# Altium PCB PCB_WETBCV1.PcbDoc
Units mm, origin at the board's own origin, x right, y up, seen from the top; angles counter-clockwise.
Board outline 80.25 x 40.26 mm, 2 copper layers (Top Layer, Bottom Layer); 35 components, 23 nets, 107 pads, 7 vias.
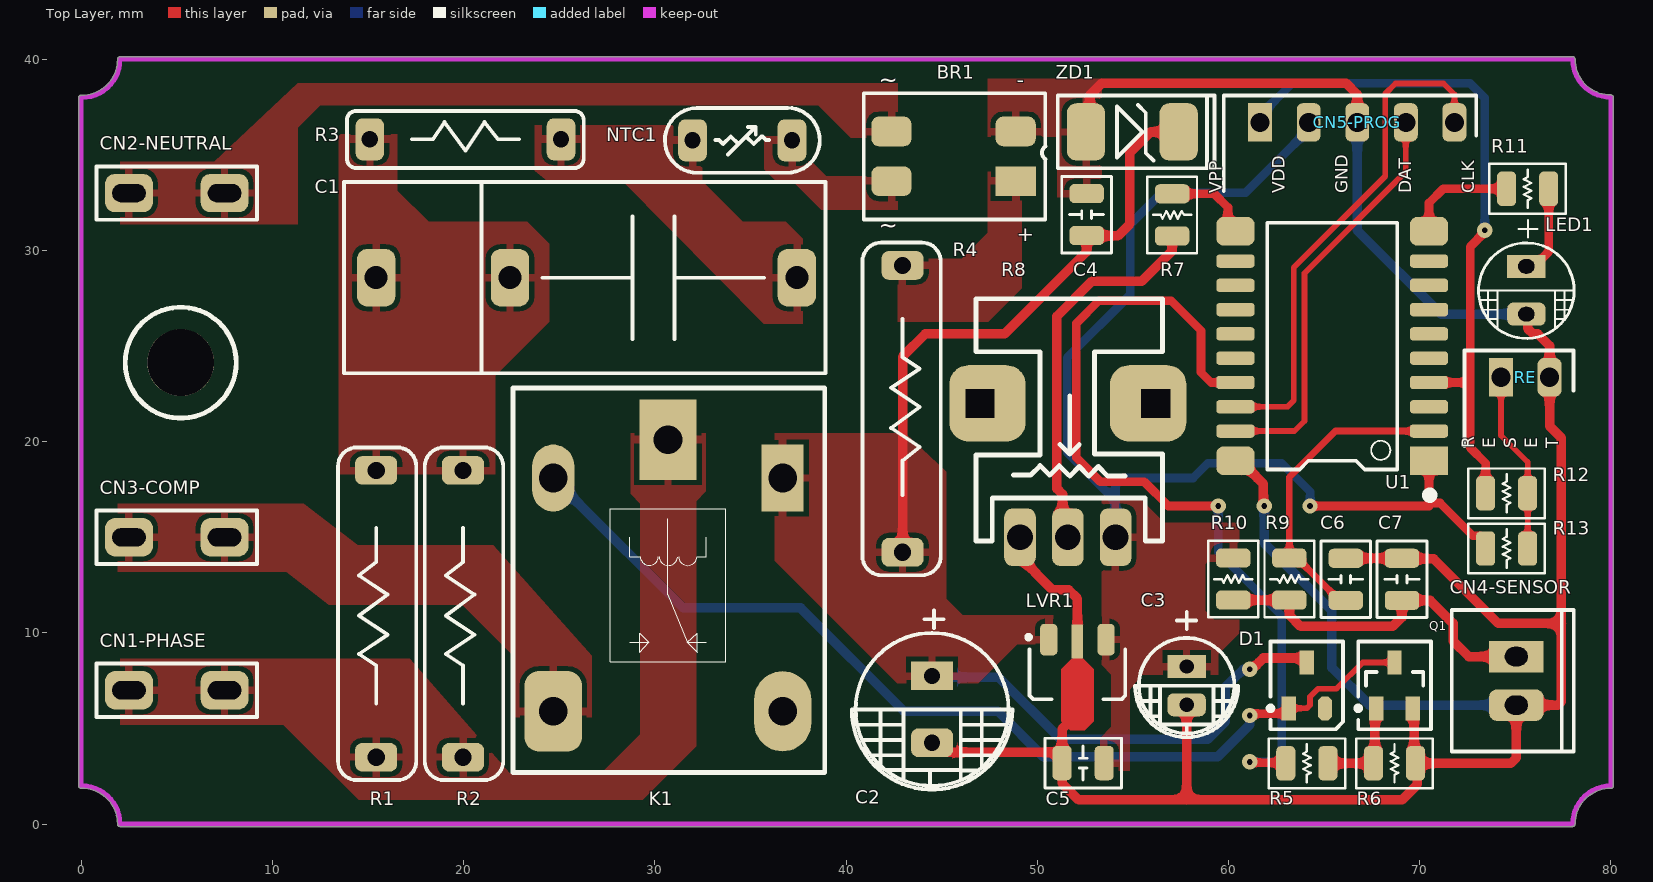
[diagram p0: Top Layer view]
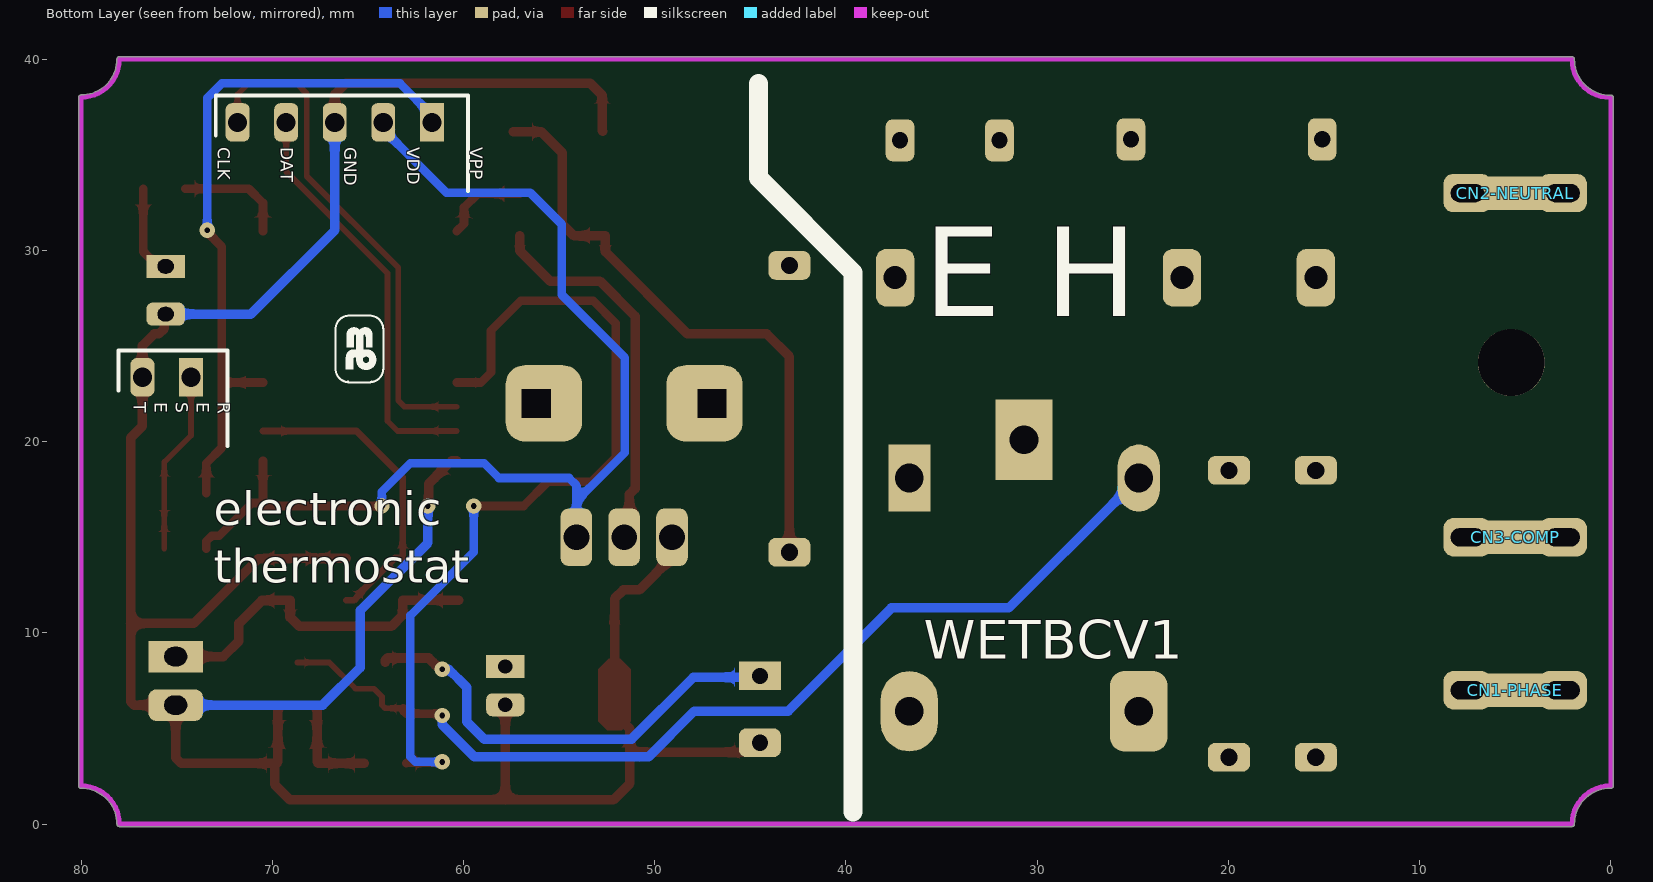
[diagram p1: Bottom Layer view, seen from below]
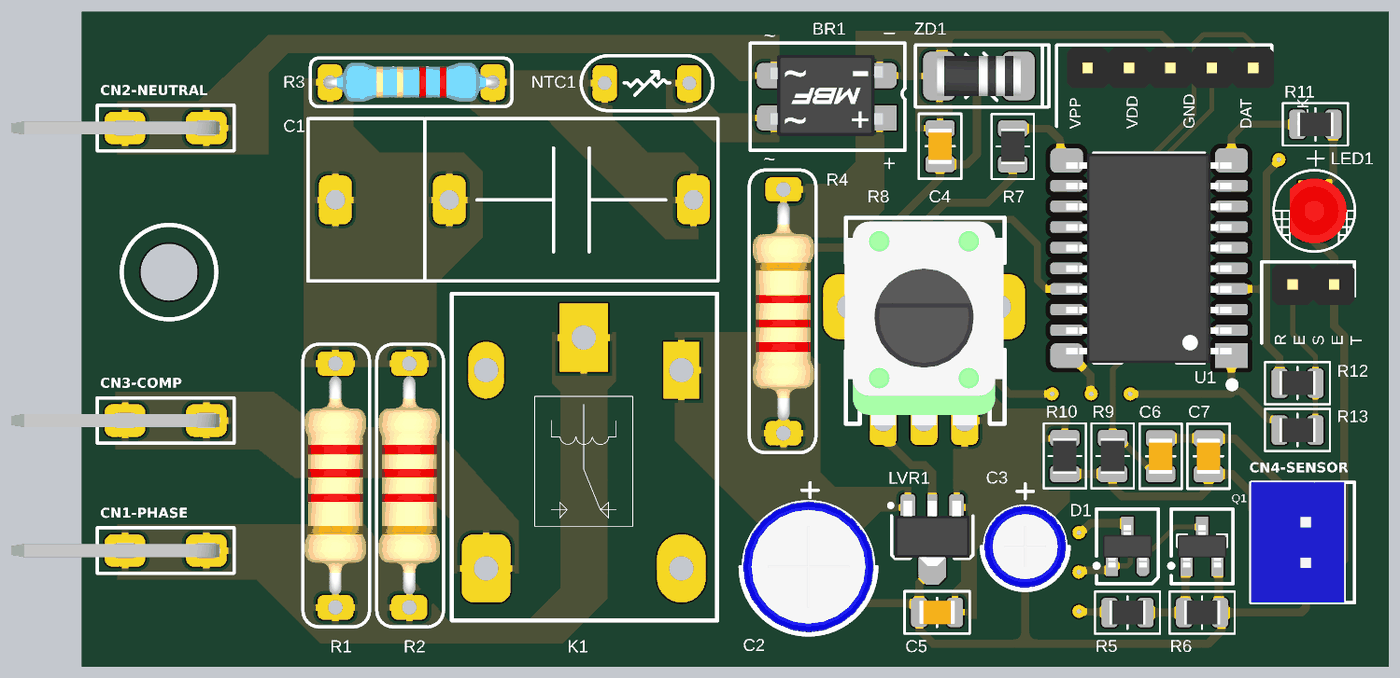
[diagram p2: 3D render of the assembled board from above, using the file's embedded part models]

## Layer stack, top to bottom
Top Solder: solder mask 0.0102, Solder Resist, Dk 3.5
Top Layer: signal copper 0.0356
Dielectric 1: dielectric 0.32, FR-4, Dk 4.8
Bottom Layer: signal copper 0.0356
Bottom Solder: solder mask 0.0102, Solder Resist, Dk 3.5

## Board outline
0.016,1.874 ccw(c0.032,2) 0.032,1.873 cw(c0.032,0) 1.905,0 ccw(c2.032,0) 2.032,-0.127 78,-0.127 ccw(c78,0) 78.127,0 cw(c80,0) 80,1.873 ccw(c80,2) 80.127,2 80.127,38.005 ccw(c80,38.005) 80,38.132 cw(c80,40.005) 78.127,40.005 ccw(c78,40.005) 77.965,40.127 2.032,40.127 ccw(c2.032,40) 1.905,39.997 ccw(c2.032,39.995) 1.905,39.995 cw(c0.032,39.995) 0.032,38.122 ccw(c0.032,37.995) 0.016,38.121 ccw(c0,37.995) -0.127,37.995 -0.127,2 ccw(c0,2)

## Design rules (kind name [scope] priority, off if disabled: settings)
Clearance [All] p1: gap=0.254 ignorepadtopadclearanceinfootprint=FALSE except(0: Arc-Hole Track-Hole SMDPad-Hole THPad-Hole Via-Hole Fill-Hole Poly-Hole Region-Hole Text-Hole)
HoleSize [All] p1: absolutevalues=TRUE maxlimit=5 minlimit=0.025 maxpercent=80.000 minpercent=20.000
PolygonConnect [All] p1: connectstyle=Relief reliefconductorwidth=0.4 reliefentries=4 polygonreliefangle="90 Angle" airgapwidth=0.254
RoutingVias [All] p1: holewidth=0.8 width=0.3 viastyle="Through Hole" minholewidth=0.6 minwidth=0.2 maxholewidth=1 maxwidth=0.6
SolderMaskExpansion [All] p1: expansion=0.102 istentingtop=FALSE
Width [All] p1: maxlimit=5 minlimit=0.254 preferedwidth=0.254
29 further rules are at their usual default settings.

## Components (designator, comment, footprint, x,y, rotation, side; value= is the part's Value field where it differs from the comment)
BR1 "MB6S" BR_SMD_MB6S 45.625,34.925 r0 top
C1 "MKP X2 .68uF" C_X2_18X10X15.8_P15 29.929,28.575 r0 top
C2 "220uF 25VDC 20%" C_Radial_P3.5 44.5,6 r270 top locked
C3 "100uF 16VDC 20%" C_Radial_P2 57.817,7.239 r270 top
C4 "0.33uF 25V 10%" C_0805 52.586,31.877 r90 top
C5 "0.1uF 16V 10%" C_0805 52.402,3.191 r180 top
C6 "0.1uF 16V 10%" C_0805 66.139,12.802 r270 top
C7 "0.1uF 16V 10%" C_0805 69.077,12.802 r270 top
CN1-PHASE "187 Series RA TAB" "CN_Tab Terminal 187 series (Right Angle)" 5,7 r180 top locked
CN2-NEUTRAL "187 Series RA TAB" "CN_Tab Terminal 187 series (Right Angle)" 5,33 r180 top locked
CN3-COMP "187 Series RA TAB" "CN_Tab Terminal 187 series (Right Angle)" 5,15 r180 top locked
CN4-SENSOR "A2512WV-2P-Red" CN_B2B-XH-A_WHITE 75.057,7.493 r0 top
CN5-PROG "2.54mm Pins" CN_PIC_MCU_Debugger_Straight 61.659,36.7 r90 top
D1 "BAS19" D_SOT-23-3_200mA 64.101,7.256 r0 top
K1 "Zettler AZ943–1CH–12DE" K_15ARelay_AZ943-1CH-12DE 30.689,13 r270 top locked
LED1 "RED, Vf=3.2V, 20mA" LED_3x5_P2.5 75.582,27.92 r270 top
LVR1 "+5VDC 100mA" U_CJ78L05_SOT89 52.102,7.847 r270 top
NTC1 "16D-7" NTC_5mmPitch 34.576,35.762 r0 top
Q1 "BC847" Q_SOT-23-3_NPN_BC847 68.687,7.256 r0 top
R1 "220Ω 2W 1%" R_Axial_P15 15.429,11 r90 top locked
R2 "220Ω 2W 1%" R_Axial_P15 19.971,11 r90 top locked
R3 "470KΩ 1/2W 1%" R_Axial_P10 20.098,35.814 r0 top
R4 "33Ω 1W 1%" R_Axial_P15 42.958,21.717 r270 top
R5 "1KΩ 1/8W 5%" R_0805 64.101,3.179 r0 top
R6 "47KΩ 1/8W 5%" R_0805 68.687,3.179 r0 top
R7 "470Ω 1/8W 5%" R_0805 57.055,31.865 r270 top
R8 "POT 10KΩ 1/8W 5%" R_POT 51.6,18.5 r0 top
R9 "1KΩ 1/8W 5%" R_0805 63.189,12.815 r90 top
R10 "10KΩ 1/8W 1%" R_0805 60.25,12.815 r270 top
R11 "470Ω 1/8W 5%" R_0805 75.649,33.227 r0 top
R12 "470Ω 1/8W 5%" R_0805 74.549,17.3 r0 top
R13 "4.7KΩ 1/8W 5%" R_0805 74.549,14.412 r0 top
RE "2P 2.54mm Male Connector" CN_PIC_MCU_Reseter_Straight 74.255,23.368 r90 top
U1 "SOIC PIC16F15344 I/SO" U_PIC16F15344_SOIC 65.429,25 r180 top locked
ZD1 "12V 1W 5%" "ZD_ZM4742A LL-41" 54.973,36.202 r180 top

## Footprints (in the part's own frame and the unit in brackets; to place one, negate y for a bottom-side part, rotate by r counter-clockwise, add the part's x,y. Pads: shape width x height; smd on the part's side, far side on the other; paste and mask are expansions set on the pad)
BR_SMD_MB6S [mm]
  rrect50% 2.1x1.55 smd: 1(-3.25,-1.3) 2(-3.25,1.3) 4(3.25,1.3)
  rect 2.1x1.55 smd: 3(3.25,-1.3)
  silkscreen extent -4.7,-3.3 4.82,3.3, body extent -3.45,-2.42 3.45,2.58, height 1.45
C_0805 [mm]
  rrect50% 1x1.8 smd: 1(-1.1,0) 2(1.1,0)
  silkscreen extent -2,-1.3 2,1.3, body extent -1.1,-0.72 1.1,0.73, height 1
C_Radial_P2 [mm] "Ø5*11mm"
  rect 1.2x2 hole 0.75: 1(-1,0)
  rrect50% 1.2x2 hole 0.75: 2(1,0)
  silkscreen extent -3.87,-2.7 2.7,2.7, body extent -2.53,-2.53 2.53,2.53, height 11.53
C_Radial_P3.5 [mm] "Ø8*11mm"
  rect 1.5x2.2 hole 0.85: 1(-1.75,0)
  rrect50% 1.5x2.2 hole 0.85: 2(1.75,0)
  silkscreen extent -5.18,-4.2 4.2,4.2, body extent -4.03,-4.03 4.03,4.03, height 12.03
C_X2_18X10X15.8_P15 [mm]
  rrect50% 2x3 hole 1.2: 1(-7.5,0) 2(7.5,0)
  silkscreen extent -9,-5 9,5, body extent -9,-5 9,5, height 15.8
CN_B2B-XH-A_WHITE [mm]
  rect 2.85x1.65 hole 1.2 slot 1 at 90 deg: 1(0,1.27)
  rrect50% 2.85x1.65 hole 1.2 slot 1 at 90 deg: 2(0,-1.27)
  silkscreen extent -3.38,-3.7 3,3.7, body extent -3.38,-3.7 2.37,3.7, height 7
CN_PIC_MCU_Debugger_Straight [mm]
  rect 2x1.25 hole 1: 1(0,0)
  rrect50% 2x1.25 hole 1: 2(0,-2.54) 3(0,-5.08) 4(0,-7.62) 5(0,-10.16)
  silkscreen extent -3.6,-11.3 1.4,1.91, body extent -1.24,-11.43 1.25,1.27, height 8.54
CN_PIC_MCU_Reseter_Straight [mm]
  rect 2x1.25 hole 1: 1(0,0)
  rrect50% 2x1.25 hole 1: 2(0,-2.54)
  silkscreen extent -3.6,-3.8 1.4,1.91, body extent -1.24,-3.81 1.25,1.27, height 8.54
"CN_Tab Terminal 187 series (Right Angle)" [mm]
  rrect50% 2.5x2 hole 0.95 slot 1.75 at 0 deg: 1(-2.5,0) 1(2.5,0)
  rect 2.85x1.75 smd far side: 1(0,0)
  silkscreen extent -4.2,-1.4 4.2,1.4, body extent -3.3,-0.4 9.5,0.4, height 9.3
D_SOT-23-3_200mA [mm] "Diodes - General Purpose 100V 200mA 1.25V @ 200mA SOT-23(SOT-23-3) RoHS"
  oct 0.75x1.25 smd: 0(0.95,-1.2)
  rect 0.75x1.25 smd: 1(-0.95,-1.2) 2(0,1.2)
  silkscreen extent -2.02,-2.3 1.9,2.3, body extent -1.5,-1.3 1.5,1.3, height 1.15
K_15ARelay_AZ943-1CH-12DE [mm]
  rect 4.2x3 hole 1.5: 1(-7.1,0)
  oval 3.5x2.2 hole 1.5: 2(-5.1,-6)
  rrect50% 4.2x3 hole 1.5: 3(7.1,-6)
  oval 4.2x3 hole 1.5: 4(7.1,6)
  rect 3.5x2.2 hole 1.5: 5(-5.1,6)
  silkscreen extent -9.8,-8.1 10.3,8.2, body extent -9.8,-8.1 10.3,8.2, height 15
LED_3x5_P2.5 [mm]
  rect 1.2x2 hole 0.85 slot 0.75 at 0 deg: 1(-1.25,0)
  rrect50% 1.2x2 hole 0.85 slot 0.75 at 0 deg: 2(1.25,0)
  silkscreen extent -3.67,-2.5 2.52,2.5, body extent -1.97,-1.5 2.01,1.99, height 7.38
NTC_5mmPitch [mm]
  rrect50% 1.5x2.2 hole 0.85: 1(-2.6,0) 2(2.6,0)
  silkscreen extent -4.05,-1.7 4.05,1.7, body extent -2.9,-1.64 2.9,1.69, height 6.75
Q_SOT-23-3_NPN_BC847 [mm] "SOT23, 3-Leads, Body 2.90x2.45mm, Pitch 0.95mm, IPC Medium Density"
  rect 0.75x1.25 smd: 1(-0.95,-1.2) 2(0.95,-1.2) 3(0,1.2)
  silkscreen extent -2.02,-2.3 1.9,2.3, body extent -1.5,-1.3 1.5,1.3, height 1.15
R_0805 [mm]
  rrect50% 1x1.8 smd: 1(-1.1,0) 2(1.1,0)
  silkscreen extent -2,-1.3 2,1.3, body extent -1.1,-0.72 1.1,0.73, height 0.65
R_Axial_P10 [mm] "Resistors 7mm Length"
  rrect50% 1.5x2.2 hole 0.85: 1(-5,0) 2(5,0)
  silkscreen extent -6.2,-1.5 6.18,1.48, body extent -5.38,-1.2 5.38,1.2, height 2.41
R_Axial_P15 [mm] "Resistors 12mm Length"
  rrect50% 1.5x2.2 hole 0.9: 1(-7.5,0) 2(7.5,0)
  silkscreen extent -8.7,-2.1 8.7,2, body extent -6.72,-1.87 6.73,1.88, height 5.87
R_POT [mm]
  rrect50% 4x4 hole 1.5 square copper offset 0.4,0: 0(-4.6,3.5)
  rrect50% 4x4 hole 1.5 square copper offset -0.4,0: 0(4.6,3.5)
  rrect50% 1.65x3 hole 1.35: 1(2.5,-3.5) 2(0,-3.5) 3(-2.5,-3.5)
  silkscreen extent -4.8,-3.7 4.95,8.97, body extent -4.88,-3.8 4.88,8.75, height 15.26
U_CJ78L05_SOT89 [mm] "SOT89, 3-Leads, Body 4.50x2.45mm, Pitch 1.50mm, Lead Span 4.1mm - Reverse Pinning, IPC Medium Density"
  rrect50% 1.65x0.9 smd: 1(-1.8,1.5) 3(-1.8,-1.5)
  rect 1.8x0.6 smd: 2(-1.7,0)
  Top Layer region: -0.8,0.3 -0.25,0.85 2.479,0.85 2.948,0.381 2.948,-0.381 2.479,-0.85 -0.25,-0.85 -0.8,-0.3
  silkscreen extent -2.03,-2.65 1.32,2.5, body extent -2.2,-2.3 1.8,2.3, height 1.6
U_PIC16F15344_SOIC [mm] "SOIC, 20-Leads, Body 12.80x7.50mm, Pitch 1.27mm, IPC Medium Density"
  rect 2x1.5 smd mask+0.3: 1(-5.063,6)
  rrect50% 2x0.7 smd mask+0.3: 2(-5.063,4.445) 3(-5.063,3.175) 4(-5.063,1.905) 5(-5.063,0.635) 6(-5.063,-0.635) 7(-5.063,-1.905) 8(-5.063,-3.175) 9(-5.063,-4.445) 12(5.063,-4.445) 13(5.063,-3.175) 14(5.063,-1.905) 15(5.063,-0.635) 16(5.063,0.635) 17(5.063,1.905) 18(5.063,3.175) 19(5.063,4.445)
  rrect50% 2x1.5 smd mask+0.3: 10(-5.063,-6) 11(5.063,-6)
  rrect50% 2x1.5 smd paste+0 mask+0.3: 20(5.063,6)
  silkscreen extent -5.3,-6.45 3.4,8, body extent -5.06,-6.42 5.09,6.48, height 2.65
"ZD_ZM4742A LL-41" [mm]
  rrect50% 2x3 smd: 1(-2.425,0) 2(2.425,0)
  silkscreen extent -4.3,-1.9 3.9,1.9, body extent -2.57,-1.23 2.58,1.23, height 2.46

## Part data
BR1: library part "Bridge Rectifier", "BRIDGE RECT 1P 600V 500MA 4SOIC, ON-SEMICONDUCTOR"
C1: library part "Capacitor Non-Polar", "684K310V P=15 18*9.5*15.5 Climate-category: 40/110/56"
C2: library part "Capacitor Polar", "Ø8*11mm 3.5mm Pitch"
C3: library part "Capacitor Polar", "Ø5*11mm 2mm Pitch"
C4 C5 C6 C7: library part "Capacitor Non-Polar", "0805 Multilayer Ceramic Capacitors"
CN1-PHASE CN2-NEUTRAL CN3-COMP: library part Connector_1PIN, "4.8mm TAB, 0.8mm thickness"
CN4-SENSOR RE: library part Connector_2PINs
CN5-PROG: library part Connector_PIC_Burn
D1: library part Diode, "SOT-23-3, Diode 200mA"
K1: library part Relay
LED1: library part LED, "F3*5mm, 2.5mm Pitch"
LVR1: library part "Voltage Regulator", "SOT-89-3L Plastic-Encapsulate Voltage Regulator"
NTC1: library part Thermistor, "5mm Pitch"
Q1: library part BJT_npn, "SOT-23-3, NPN 200mA"
R1 R2: library part Resistor, "Metal Oxide Film Resistor, Through Hole Axial, L=12, øD=5, H=28, ød=0.6, Flame Proof"
R3: library part Resistor, "Metal Oxide Film Resistor, Through Hole Axial, L=7, øD=2.5, H=28, ød=0.48, Flame Proof"
R4: library part Resistor, "Metal Oxide Film Resistor, Through Hole Axial, L=10, øD=4, H=28, ød=0.5, Flame Proof"
R5 R6 R7 R9 R10 R11 R12 R13: library part Resistor, "0805 Thick Film SMD Resistor"
R8: library part POT, "3Pin Potentiometer HRX09"
U1: library part IC_PIC_20pins
ZD1: library part "Zener Diode", "DO-213AB (glass)  (ZM4742A LL-41)"

## Free pads (board coordinates)
  round 3.5 hole 3.5 unplated: 0(5.207,24.13)
  rrect50% 2x3 hole 1.2: 1(15.429,28.575)

## Via types
v1: diameter 0.8, hole 0.3, Top Layer to Bottom Layer, 7 vias

## Nets (pads, with @x,y where several pads share a name; then routed paths per layer and width w, separated by ;. In a path a pad name is that pad's centre, name@x,y a point inside that pad or via, vN(x,y) a via of type N, cw(c..) or ccw(c..) an arc to the next point about the centre after c; other vN are vias at no path point)
+5V: C3.1 C5.1 CN5-PROG.2 LVR1.1 R8.1 R10.1 R13.1 U1.1 | length 56.2
  Top Layer w0.45: v1(64.272,16.637) 70.492,16.637 70.492,16.793 ; U1.1 70.492,16.793 ; R13.1 73.449,14.799 73.176,15.072 72.789,15.072 71.069,16.793 70.492,16.793
  Bottom Layer w0.45: R8.1 54.1,16.893 ; CN5-PROG.2 64.199,36.325 60.894,33.02 56.515,33.02 54.864,31.369 54.864,27.686 51.562,24.384 51.562,19.431 54.1,16.893 ; v1(64.272,16.637) 64.272,17.389 62.781,18.88 58.928,18.88 58.148,18.1 54.483,18.1 54.1,17.717 54.1,16.893
+12V: C2.1 C4.1 D1.2 K1.5 LVR1.3 R4.2 ZD1.1 | length 55.9
  Top Layer w0.5: R4.2 42.958,24.447 44.146,25.635 48.288,25.635 52.586,29.933 C4.1 52.599,30.765 54.22,30.765 54.849,31.394 54.849,35.121 55.93,36.202 ZD1.1 ; v1@61.245,8.097 61.833,8.685 63.976,8.685 64.101,8.56 D1.2
  Bottom Layer w0.5: C2.1@44.736,7.681 47.977,7.681 51.213,4.445 58.928,4.445 59.842,5.359 59.842,7.166 60.773,8.097 v1(61.119,8.097) v1@61.119,8.239
_fs: C6.2 R9.2 U1.2 | length 16.4
  Top Layer w0.35: C6.2 65.739,11.702 65.489,11.952 65.489,12.014 63.589,13.915 R9.2 63.189,18.146 65.598,20.555 U1.2
_IND: R11.1 U1.10 | length 5.8
  Top Layer w0.45: U1.10 70.492,32.482 71.236,33.227 R11.1
_KNOB: R7.1 U1.11 | length 4.6
  Top Layer w0.45: R7.1 59.26,32.965 59.976,32.248 59.976,31.39 U1.11
_MOTOR: R5.1 U1.17 | length 45.5
  Top Layer w0.45: v1(59.468,16.637) 56.862,16.637 55.599,17.9 53.302,17.9 52.048,19.154 52.048,26.195 53.231,27.378 56.997,27.378 58.566,25.809 58.566,23.622 59.093,23.095 U1.17 ; v1(61.119,3.253) 61.156,3.216 62.964,3.216 R5.1
  Bottom Layer w0.45: v1(59.468,16.637) 59.468,14.224 62.781,10.911 62.781,3.517 62.517,3.253 v1(61.119,3.253)
AC_L: CN1-PHASE.1 K1.1 R1.1 R2.1
AC_M: CN3-COMP.1 K1.3
AC_N: BR1.2 CN2-NEUTRAL.1
CLK: CN5-PROG.5 U1.18 | length 26.8
  Top Layer w0.3: U1.18 63.097,21.825 63.422,22.15 63.422,29.102 68.199,33.879 68.199,38.195 68.739,38.735 71.247,38.735 71.819,38.163 CN5-PROG.5
DAT: CN5-PROG.4 U1.19 | length 21.6
  Top Layer w0.3: U1.19 63.449,20.555 63.976,21.082 63.976,28.809 69.279,34.112 CN5-PROG.4
FS: C7.2 CN4-SENSOR.1 R9.1 R10.2 | length 18.7
  Top Layer w0.5: R10.2 R9.1 63.189,10.922 63.772,10.339 68.592,10.339 69.077,10.824 C7.2 70.546,11.702 71.755,10.494 71.755,9.577 72.569,8.763 CN4-SENSOR.1
GND: BR1.4 C2.2 C3.2 C4.2 C5.2 C6.1 C7.1 CN4-SENSOR.2 CN5-PROG.3 LED1.2 LVR1.2 Q1.2 R6.2 R8.3 RE.2 U1.20 ZD1.2 | length 152.1
  Top Layer w0.5: C2.2@44.736,4.181 45.159,3.758 51.052,3.758 C5.2@51.302,3.508 ; R8.3@48.879,14.85 48.879,14.175 50.806,12.247 51.643,12.247 52.102,11.788 LVR1.2 52.102,9.03 52.102,5.781 51.302,4.981 C5.2@51.302,3.508 ; ZD1.2@52.713,36.225 52.756,36.268 52.756,38.122 53.369,38.735 66.167,38.735 66.739,38.163 CN5-PROG.3 ; C3.2 57.817,1.27 ; U1.20 60.616,19 61.829,17.787 61.829,16.678 v1(61.87,16.637) ; C6.1 C7.1 69.1,13.879 70.727,13.879 74.113,10.494 77.416,10.494 ; Q1.2 69.712,5.981 69.712,3.254 R6.2 ; LED1.2 75.649,26.603 75.649,25.928 75.942,25.635 76.179,25.635 76.795,25.019 RE.2 76.795,20.814 77.416,20.193 77.416,10.494 ; C5.2@51.302,3.508 C5.2 51.302,2.13 52.162,1.27 57.817,1.27 ; 57.817,1.27 69.077,1.27 69.882,2.075 69.882,3.084 R6.2 ; R6.2 74.764,3.179 75.057,3.471 CN4-SENSOR.2 77.232,6.223 77.416,6.407 77.416,9.447 77.416,10.494
  Bottom Layer w0.5: v1(61.87,16.637) 61.87,14.711 65.405,11.176 65.405,8.186 67.368,6.223 CN4-SENSOR.2 ; CN5-PROG.3 66.739,31.051 71.12,26.67 LED1.2
NetBR1_1: BR1.1 NTC1.2
NetBR1_3: BR1.3 R4.1
NetC1_1: C1.1 pad.1 R1.2 R2.2 R3.1
NetC1_2: C1.2 NTC1.1 R3.2
NetD1_1: D1.1 K1.2 Q1.3 | length 52.8
  Top Layer w0.3: D1.1 64.096,6.056 64.272,6.231 64.272,6.66 64.696,7.085 65.655,7.085 67.026,8.456 Q1.3
  Top Layer w0.45: v1(61.119,5.675) 61.224,5.781 63.001,5.781 63.151,5.931 D1.1
  Bottom Layer w0.5: K1.2 24.689,17.924 25.497,17.115 25.674,17.115 31.486,11.303 37.624,11.303 43.027,5.9 47.939,5.9 50.322,3.517 59.429,3.517 61.119,5.207 v1(61.119,5.675)
NetLED1_1: LED1.1 R11.2 | length 4.8
  Top Layer w0.45: LED1.1 75.982,29.17 76.749,29.937 R11.2
NetQ1_1: Q1.1 R5.2 R6.1 | length 5.3
  Top Layer w0.5: R5.2 R6.1 67.662,3.253 67.662,5.981 Q1.1
NetR7_2: R7.2 R8.2 | length 20
  Top Layer w0.5: R8.2 51.328,15.272 51.328,17.25 51.032,17.546 51.032,26.559 52.875,28.401 55.479,28.401 57.055,29.977 R7.2
NetR12_2: R12.2 R13.2 RE.1 | length 9.5
  Top Layer w0.3: RE.1 74.255,20.327 75.649,18.933 R12.2 R13.2
VPP: CN5-PROG.1 R12.1 U1.4 | length 36.6
  Top Layer w0.45: U1.4 72.644,23.095 ; R12.1 73.449,18.88 72.644,19.685 72.644,23.095 ; v1@73.449,31 72.644,30.195 72.644,23.095
  Bottom Layer w0.45: CN5-PROG.1 61.659,37.075 63.319,38.735 72.644,38.735 73.406,37.973 v1@73.406,30.988
  other v1: 73.406,31.051
pads on no net: D1.0 K1.4 R8.0 U1.3 U1.5 U1.6 U1.7 U1.8 U1.9 U1.12 U1.13 U1.14 U1.15 U1.16

## Polygon pours and split planes (outlines as drawn)
+5V on Top Layer "Top Layer-+5V" (solid, remove dead copper, pour order 20): 55.288,17.109 56.649,15.748 60.557,15.748 60.557,13.915 59.063,13.915 58.801,13.597 58.801,11.158 59.26,10.699 60.557,10.699 60.557,9.979 59.468,8.89 59.468,7.816 55.479,7.816 54.84,7.019 54.84,2.794 53.293,2.794 53.293,4.49 53.883,5.08 53.883,7.816 53.372,8.327 53.372,17.109
+12V on Top Layer "Top Layer-+12V" (solid, remove dead copper, pour order 18): 36.27,20.447 43.1,20.447 45.244,18.434 45.244,11.778 46.1,10.922 50.832,10.922 50.832,9.398 48.96,9.398 46.928,7.366 42.675,7.366 36.27,13.771
NetBR1_3 on Top Layer "Top Layer-NetBR1_3" (solid, remove dead copper, pour order 16): 42.704,29.575 46.041,29.575 47.403,30.937 47.403,34.116 49.181,34.116 49.181,28.021 47.442,26.282 42.704,26.282
GND on Top Layer "Top Layer-GND" (solid, remove dead copper, pour order 14): 47.403,36.957 47.403,38.989 53.369,38.989 53.369,32.775 51.054,32.775 51.054,35.941 50.133,35.941 47.403,35.941
NetBR1_1 on Top Layer "Top Layer-NetBR1_1" (solid, remove dead copper, pour order 12): 35.732,35.978 35.732,34.251 36.359,33.625 37.22,33.625 38.714,32.131 42.704,32.131 42.704,33.894 38.963,33.894 36.878,35.978
AC_N on Top Layer "Top Layer-AC_N" (solid, remove dead copper, pour order 10): 11.333,31.369 11.333,36.41 12.515,37.592 38.537,37.592 40.24,35.889 42.704,35.889 42.704,38.481 42.704,38.735 42.45,38.735 11.325,38.735 6.964,34.636 2.032,34.636 2.032,31.369
NetC1_2 on Top Layer "Top Layer-NetC1_2" (solid, remove dead copper, pour order 8): 31.209,36.539 32.474,35.274 32.474,33.625 34.603,31.496 36.862,31.496 37.751,30.607 37.751,26.162 35.705,26.162 28.332,33.625 24.39,33.625 23.73,34.163 23.73,36.539
NetC1_1 on Top Layer "Top Layer-NetC1_1" (solid, remove dead copper, pour order 6): 13.48,18.288 13.48,36.068 16.542,36.068 16.542,33.122 18.168,31.496 23.329,31.496 24.478,30.348 24.478,26.282 21.657,23.461 21.657,18.288
AC_M on Top Layer "Top Layer-AC_M" (solid, remove dead copper, pour order 4): 1.905,13.208 10.722,13.208 12.952,11.46 19.941,11.46 22.629,8.772 22.629,5.588 26.702,5.588 26.702,8.814 21.55,14.595 14.449,14.612 11.644,16.764 1.905,16.764
AC_L on Top Layer "Top Layer-AC_L" (solid, remove dead copper, pour order 2): 2.032,8.636 17.184,8.636 22.406,2.667 27.21,2.667 29.242,4.699 29.242,16.764 28.734,17.272 28.734,20.447 32.671,20.447 32.671,17.4 32.162,16.892 32.162,4.063 29.369,1.27 14.51,1.27 10.573,5.207 2.032,5.207

## Keep-outs
Keep-Out Layer:
  lines w0.254: 0,2 0,37.995 ; 0.032,2 cw(c0.032,0) 2.032,0 78,0 cw(c80,0) 80,2 80,38.005 cw(c80,40.005) 78,40.005 ; 0.032,37.995 ccw(c0.032,39.995) 2.032,39.995 ; 2.032,40 78,40

## Silkscreen, mask and mechanical layers (free items; w line width, h text height)
Top Overlay:
  circle w0.254: c5.207,24.13 r2.904
  lines w0.2: 20.987,23.575 13.748,23.575 13.748,33.575 20.987,33.575
Bottom Overlay:
  drawing of 5 lines, arcs and shapes, not listed
  text "H" at 29.591,25.019 h8
  text "E" at 35.941,25.019 h8
  text "electronic / thermostat" at 73.059,12.047 h3
  text "WETBCV1" at 35.941,8.636 h2

## Text inside footprints (layer, text, board x,y; h text height)
BR1: Top Overlay "~" at 41.725,38.225 h1.5; Top Overlay "~" at 41.725,30.625 h1.5; Top Overlay "-" at 48.925,39.125 h0.8 r180; Top Overlay "+" at 48.925,31.125 h0.8 r180
CN5-PROG: Top Overlay "VPP /  /  / VDD /  /  / GND /  /  / DAT /  /  / CLK" at 73.059,33 h1.1 r90; Bottom Overlay "VPP /  /  / VDD /  /  / GND /  /  / DAT /  /  / CLK" at 73.059,35.4 h1.1 r90
RE: Top Overlay "R / E / S / E / T" at 77.455,19.668 h1.1 r90; Bottom Overlay "R / E / S / E / T" at 77.455,22.068 h1.1 r90